# EAGLE board DAQ3 (EAGLE 7.6.0)
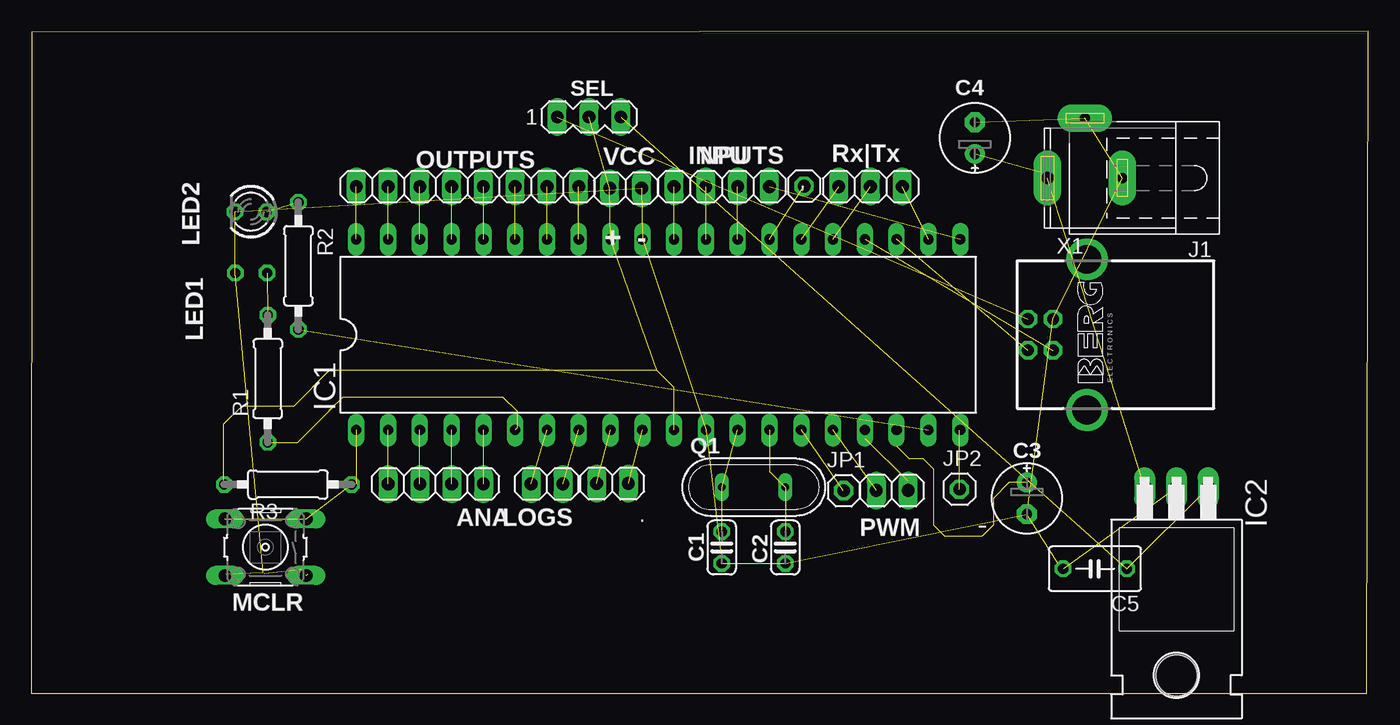
[diagram p0: board, top side]
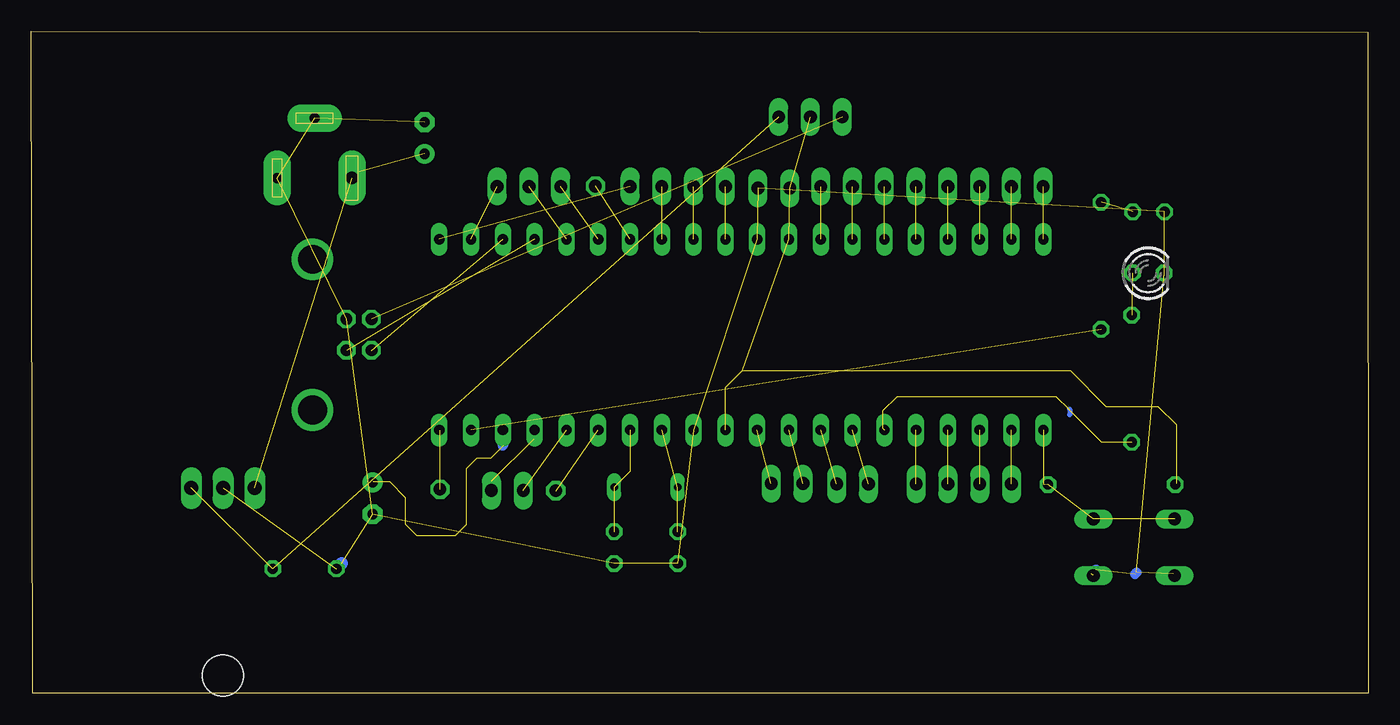
[diagram p1: board, bottom side, seen from below]

Size 106.83 x 52.91 mm. Coordinates in mm from the lower left corner, seen from the top.
Outline: 0,0 106.72,0 106.83,52.91 0.04,52.84 0,0
Copper layers (1*16): Top 0.035mm / dielectric 1.5mm / Bottom 0.035mm
Design rules "default *": minimum track width 10mil, minimum drill 24mil, track to track 30mil, track to pad 30mil, pad to pad 30mil, via to via 30mil, smd to smd 30mil, copper to edge 40mil, drill to drill 8mil, minimum pad ring 10mil, minimum via ring 8mil, stop-mask expansion 4mil, vias tented up to drill 0mil, thermal gap 10mil

## Footprints (pad centres in the part's own frame; a part is rotated, then mirrored left to right if it is on the bottom)
1X01 = drill 1.016 octagon: 1 0,0
1X02 = drill 1.016 long: 1 -1.27,0; 2 1.27,0
1X04 = drill 1.016 long: 1 -3.81,0; 2 -1.27,0; 3 1.27,0; 4 3.81,0
C025-024X044 = drill 0.813 octagon: 1 -1.27,0; 2 1.27,0
E2,5-6E = drill 0.813 pad 1.575: + -1.27,0 | drill 0.813 pad 1.575 octagon: - 1.27,0
C050-035X075 = drill 0.813 octagon: 1 -2.54,0; 2 2.54,0
DIL40 = drill 0.813 long: 1 -24.13,-7.62; 2 -21.59,-7.62; 3 -19.05,-7.62; 4 -16.51,-7.62; 5 -13.97,-7.62; 6 -11.43,-7.62; 7 -8.89,-7.62; 8 -6.35,-7.62; 9 -3.81,-7.62; 10 -1.27,-7.62; 11 1.27,-7.62; 12 3.81,-7.62; 13 6.35,-7.62; 14 8.89,-7.62; 15 11.43,-7.62; 16 13.97,-7.62; 17 16.51,-7.62; 18 19.05,-7.62; 19 21.59,-7.62; 20 24.13,-7.62; 21 24.13,7.62; 22 21.59,7.62; 23 19.05,7.62; 24 16.51,7.62; 25 13.97,7.62; 26 11.43,7.62; 27 8.89,7.62; 28 6.35,7.62; 29 3.81,7.62; 30 1.27,7.62; 31 -1.27,7.62; 32 -3.81,7.62; 33 -6.35,7.62; 34 -8.89,7.62; 35 -11.43,7.62; 36 -13.97,7.62; 37 -16.51,7.62; 38 -19.05,7.62; 39 -21.59,7.62; 40 -24.13,7.62
TO220H = drill 1.118 long: 1 -2.54,-10.16; 2 0,-10.16; 3 2.54,-10.16 | hole 3.302: 0,4.826
SPC4077 = drill 0.8 pad 2.184 long: 1 -3,0; 2 0,-4.8 | drill 1 pad 2.184 long: 3 3,0
LED3MM = drill 0.813 octagon: A -1.27,0; K 1.27,0
B3F-10XX = drill 1.016 long: 1 -3.251,2.261; 2 3.251,2.261; 3 -3.251,-2.261; 4 3.251,-2.261
1X03 = drill 1.016 long: 1 -2.54,0; 2 0,0; 3 2.54,0
1X08 = drill 1.016 long: 1 -8.89,0; 2 -6.35,0; 3 -3.81,0; 4 -1.27,0; 5 1.27,0; 6 3.81,0; 7 6.35,0; 8 8.89,0
QS = drill 0.61 long: 1 -2.54,0; 2 2.54,0
0207/10 = drill 0.813 octagon: 1 -5.08,0; 2 5.08,0
MA03-1 = drill 1.016 long: 1 -2.54,0; 2 0,0; 3 2.54,0
PN61729-S = drill 0.95 octagon: 1 1.25,4.71; 2 -1.25,4.71; 3 -1.25,2.71; 4 1.25,2.71 | drill 2.3 pad 2.9: S1 -6.02,0; S2 6.02,0

## Placement (x,y rotation side)
,  [1X01]  61.76,40.54 0 top
.  7 8  [1X02]  46.44,16.76 180 top
ANA  1 2 3 4  [1X04]  32.32,16.73 180 top
C1  22p  [C025-024X044]  55.18,11.65 90 top
C2  22p  [C025-024X044]  60.26,11.65 90 top
C3  47nF  [E2,5-6E]  79.56,15.58 270 top
C4  47nF  [E2,5-6E]  75.4,44.39 90 top
C5  [C050-035X075]  85,9.94 180 top
IC1  PIC18F4550_40  [DIL40]  50.1,28.66 0 top
IC2  7805T  [TO220H]  91.51,6.25 180 top
INPU  8 7 6 5  [1X04]  55.18,40.5 0 top
J1  [SPC4077]  84.2,41.19 180 top
JP1  [1X01]  64.92,16.19 0 top
JP2  [1X01]  74.18,16.31 0 top
LED1  RED  [LED3MM]  17.57,33.59 0 bottom
LED2  GREEN  [LED3MM]  17.55,38.48 180 top
LOGS  5 6  [1X02]  41.21,16.73 180 top
MCLR  [B3F-10XX]  18.72,11.67 180 top
NPUTS  4 3  [1X03]  67.06,40.5 0 top
OUTPUTS  1 2 3 4 5 6 7 8  [1X08]  34.86,40.5 0 top
PWM  2 1  [1X02]  68.79,16.21 180 top
Q1  20MHz  [QS]  57.72,16.47 0 top
R1  330  [0207/10]  18.89,25.15 90 top
R2  330  [0207/10]  21.34,34.16 270 top
R3  4K7  [0207/10]  20.51,16.69 0 top
SEL  [MA03-1]  44.57,46.06 0 top
VCC  V G  [1X02]  47.49,40.37 0 top
X1  PN61729-S  [PN61729-S]  84.36,28.66 90 top

## Library data of the parts
, . ANA INPU JP1 JP2 LOGS NPUTS OUTPUTS PWM VCC = pinhead
C1 C2 C5 = rcl
C3 C4 R1-R3 = resistor
IC1 = microchip; MF: MICROCHIP; MPN: PIC18F4550-I/P; OC_FARNELL: 9321357; OC_NEWARK: 74K8623
IC2 = linear
J1 = con-jack; OC_FARNELL: unknown; OC_NEWARK: unknown
LED1 = led; MF: VISHAY SEMICONDUCTOR; OC_FARNELL: 1612437
LED2 = led; MF: VISHAY SEMICONDUCTOR; OC_FARNELL: 1612435
MCLR = switch-omron; MPN: B3F-1000; OC_FARNELL: 176432; OC_NEWARK: 36M3542
Q1 = special
SEL = con-lstb; OC_FARNELL: unknown; OC_NEWARK: unknown
X1 = con-berg; OC_FARNELL: unknown; OC_NEWARK: unknown

## Nets
+5PIC: IC1.11 IC1.32 R3.1 SEL.2 VCC.1
+5USB: SEL.1 X1.1
GND: C1.1 C2.1 C3.- C4.- C5.2 IC1.12 IC1.31 IC2.2 J1.1 J1.2 LED1.K LED2.K MCLR.1 MCLR.2 VCC.2 X1.4
MCLR: IC1.1 MCLR.3 MCLR.4 R3.2
N$1: IC1.23 X1.2
N$2: IC1.30 INPU.1
N$3: IC1.40 OUTPUTS.1
N$5: LED2.A R2.1
N$6: IC1.25 NPUTS.2
N$7: LED1.A R1.2
N$8: IC1.39 OUTPUTS.2
N$9: IC1.38 OUTPUTS.3
N$10: IC1.37 OUTPUTS.4
N$11: IC1.36 OUTPUTS.5
N$12: IC1.35 OUTPUTS.6
N$13: IC1.34 OUTPUTS.7
N$14: IC1.33 OUTPUTS.8
N$15: IC1.24 X1.3
N$16: IC1.29 INPU.2
N$17: IC1.28 INPU.3
N$18: IC1.22 NPUTS.3
N$19: IC1.15 JP1.1
N$20: C3.+ IC1.18
N$21: IC1.21 INPU.4
N$22: IC1.19 R2.2
N$23: ANA.4 IC1.2
N$24: ANA.3 IC1.3
N$25: ANA.2 IC1.4
N$26: ANA.1 IC1.5
N$27: IC1.7 LOGS.2
N$28: IC1.8 LOGS.1
N$29: IC1.20 JP2.1
N$31: ..2 IC1.9
N$32: ..1 IC1.10
N$131: C4.+ IC2.3 J1.3
N$132: C5.1 IC2.1 SEL.3
N$137: IC1.26 NPUTS.1
PWM1: IC1.17 PWM.1
PWM2: IC1.16 PWM.2
V+: ,.1 IC1.27
VCC: IC1.6 R1.1
XTAL1: C1.2 IC1.13 Q1.1
XTAL2: C2.2 IC1.14 Q1.2

## Tracks (layer width: path | path; a pad name or v marks a point on that pad's centre or on a via)
+5PIC  (10 unrouted)
  Bottom 1.016: 15.35,16.76 R3.1
+5USB  (1 unrouted)
GND  (17 unrouted)
  Bottom 0.813: 55.01,10.21 C1.1 | 21.84,9.53 MCLR.1 | 21.74,9.9 22.11,9.53 | 15.59,9.53 MCLR.2 | 18.51,9.65 18.63,9.53
  Bottom 1.016: 82.02,10.38 C5.2
MCLR  (4 unrouted)
N$1  (1 unrouted)
N$2  (1 unrouted)
N$3  (1 unrouted)
N$5  (1 unrouted)
N$6  (1 unrouted)
N$7  (1 unrouted)
N$8  (1 unrouted)
N$9  (1 unrouted)
N$10  (1 unrouted)
N$11  (1 unrouted)
N$12  (1 unrouted)
N$13  (1 unrouted)
N$14  (1 unrouted)
N$15  (1 unrouted)
N$16  (1 unrouted)
N$17  (1 unrouted)
N$18  (1 unrouted)
N$19  (1 unrouted)
N$20  (10 unrouted)
  Bottom 0.813: IC1.18 69.15,19.77
  Bottom 1.016: 79.54,16.88 C3.+
N$21  (1 unrouted)
N$22  (1 unrouted)
N$23  (1 unrouted)
N$24  (1 unrouted)
N$25  (1 unrouted)
N$26  (1 unrouted)
N$27  (1 unrouted)
N$28  (1 unrouted)
N$29  (1 unrouted)
  Bottom 1.016: 74.18,20.99 IC1.20
N$31  (1 unrouted)
N$32  (1 unrouted)
N$131  (2 unrouted)
  Bottom 1.016: 80.71,41.67 J1.3
N$132  (2 unrouted)
N$137  (1 unrouted)
PWM1  (1 unrouted)
  Bottom 1.016: 70.06,15.44 PWM.1 70.06,16.97 70.05,16.97 | 66.67,20.34 66.67,20.98 IC1.17
PWM2  (1 unrouted)
V+  (1 unrouted)
VCC  (9 unrouted)
  Bottom 0.406: 23.85,22.69 23.85,22.25
XTAL1  (2 unrouted)
XTAL2  (3 unrouted)

## Text on the board
tNames: Rx|Tx | + | - | D:/IMAGENES/UDP MICROCHIP.bmp